# EAGLE board axiom_beta_interface_cmv12000_v0.3.698cb37a (EAGLE 7.0.0)
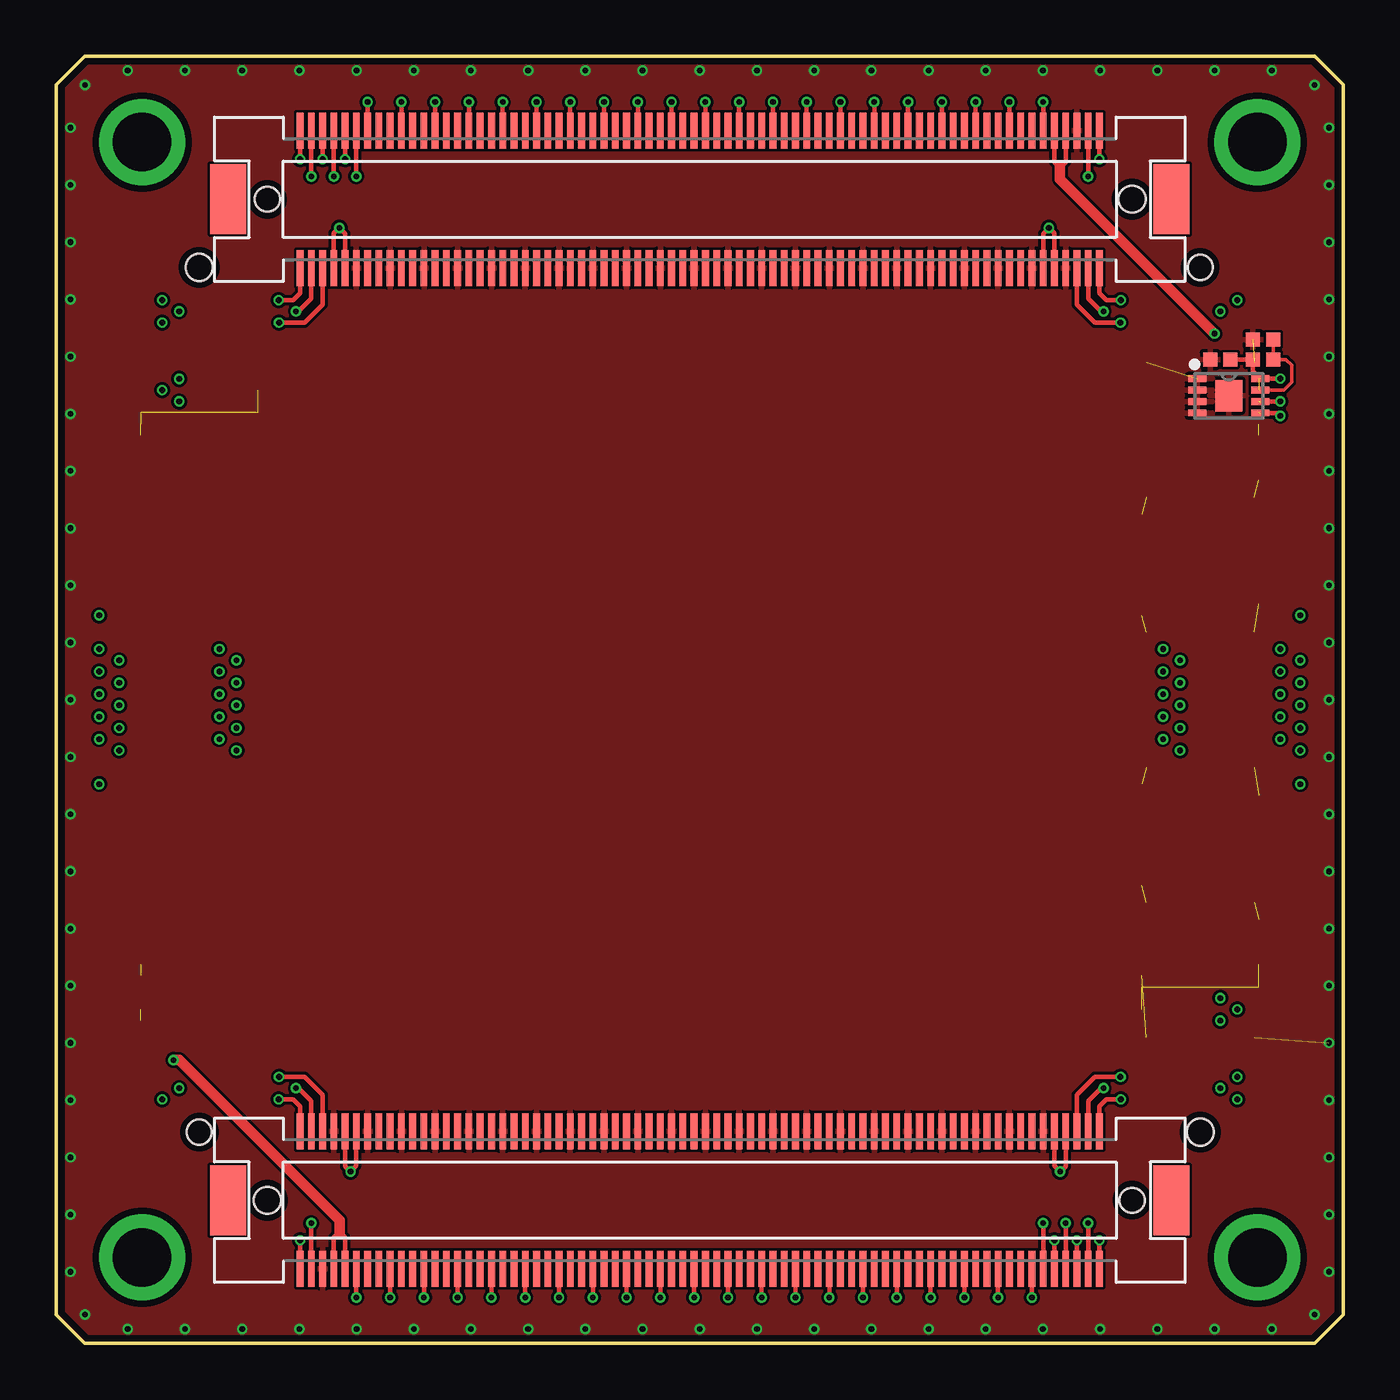
[diagram p0: board, top side]
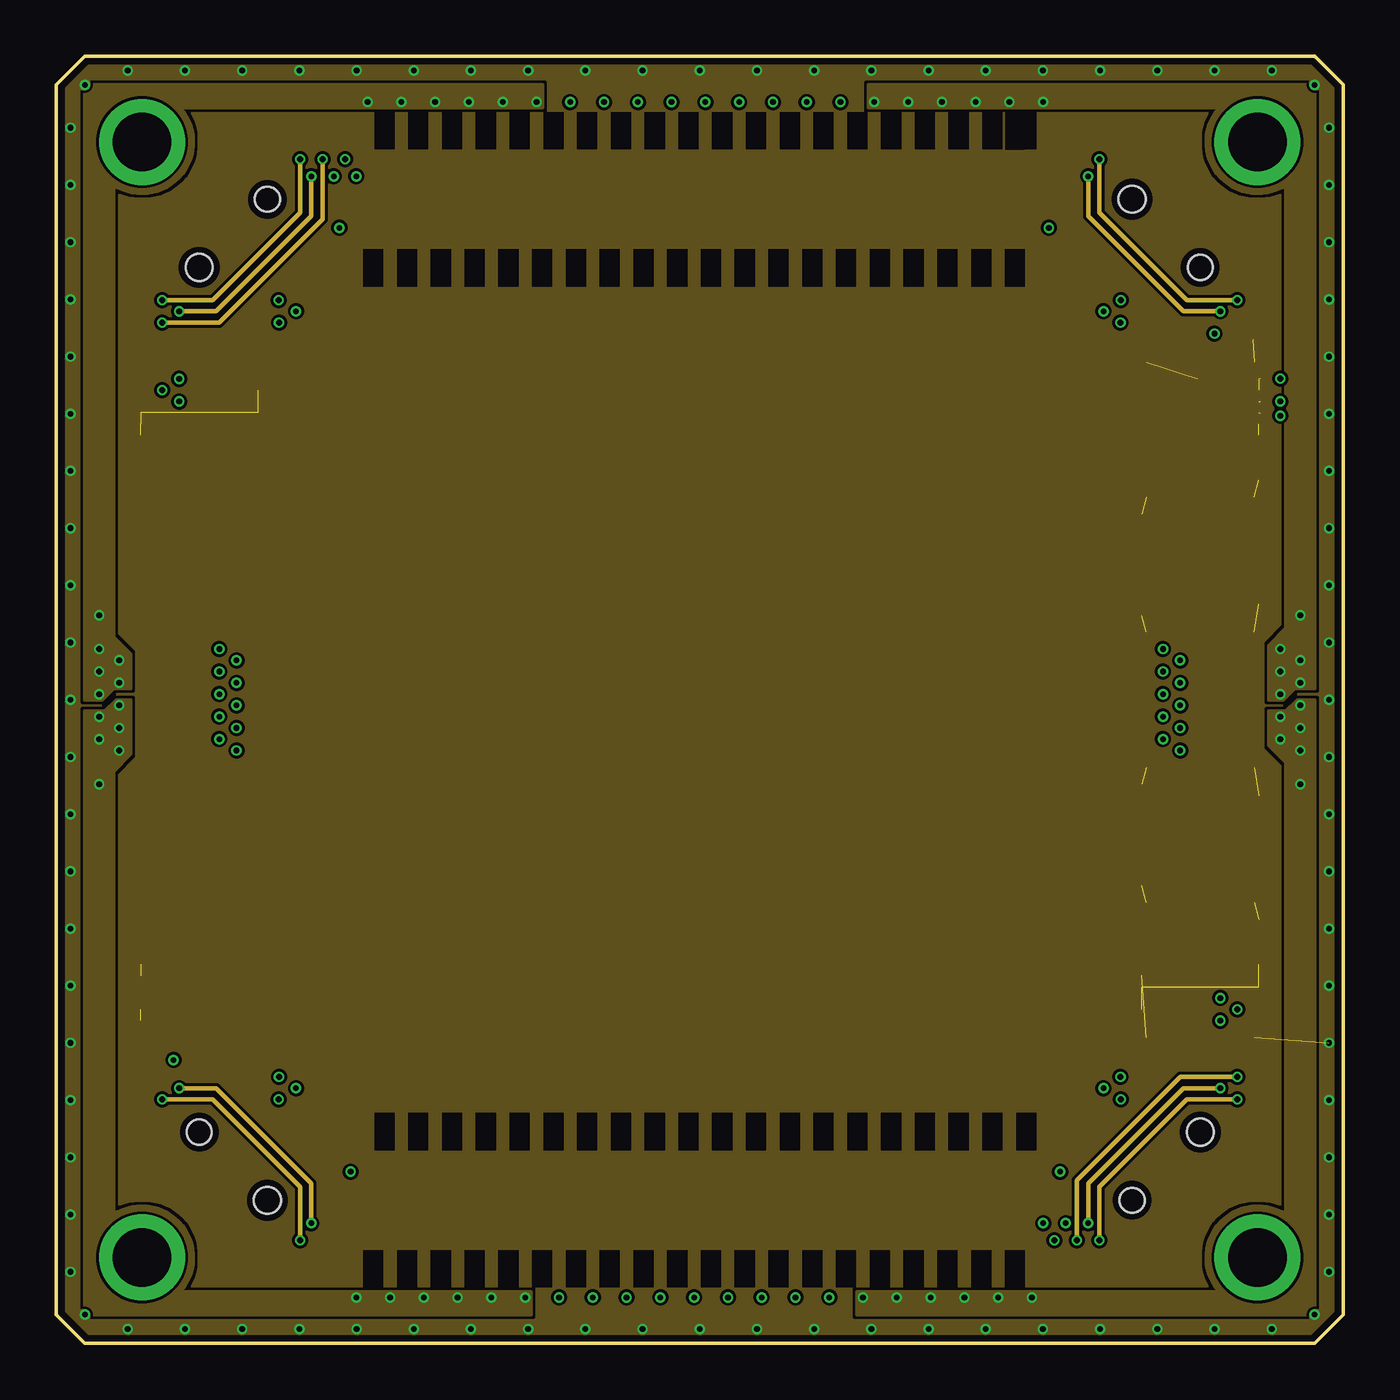
[diagram p1: board, inner layer Route2]
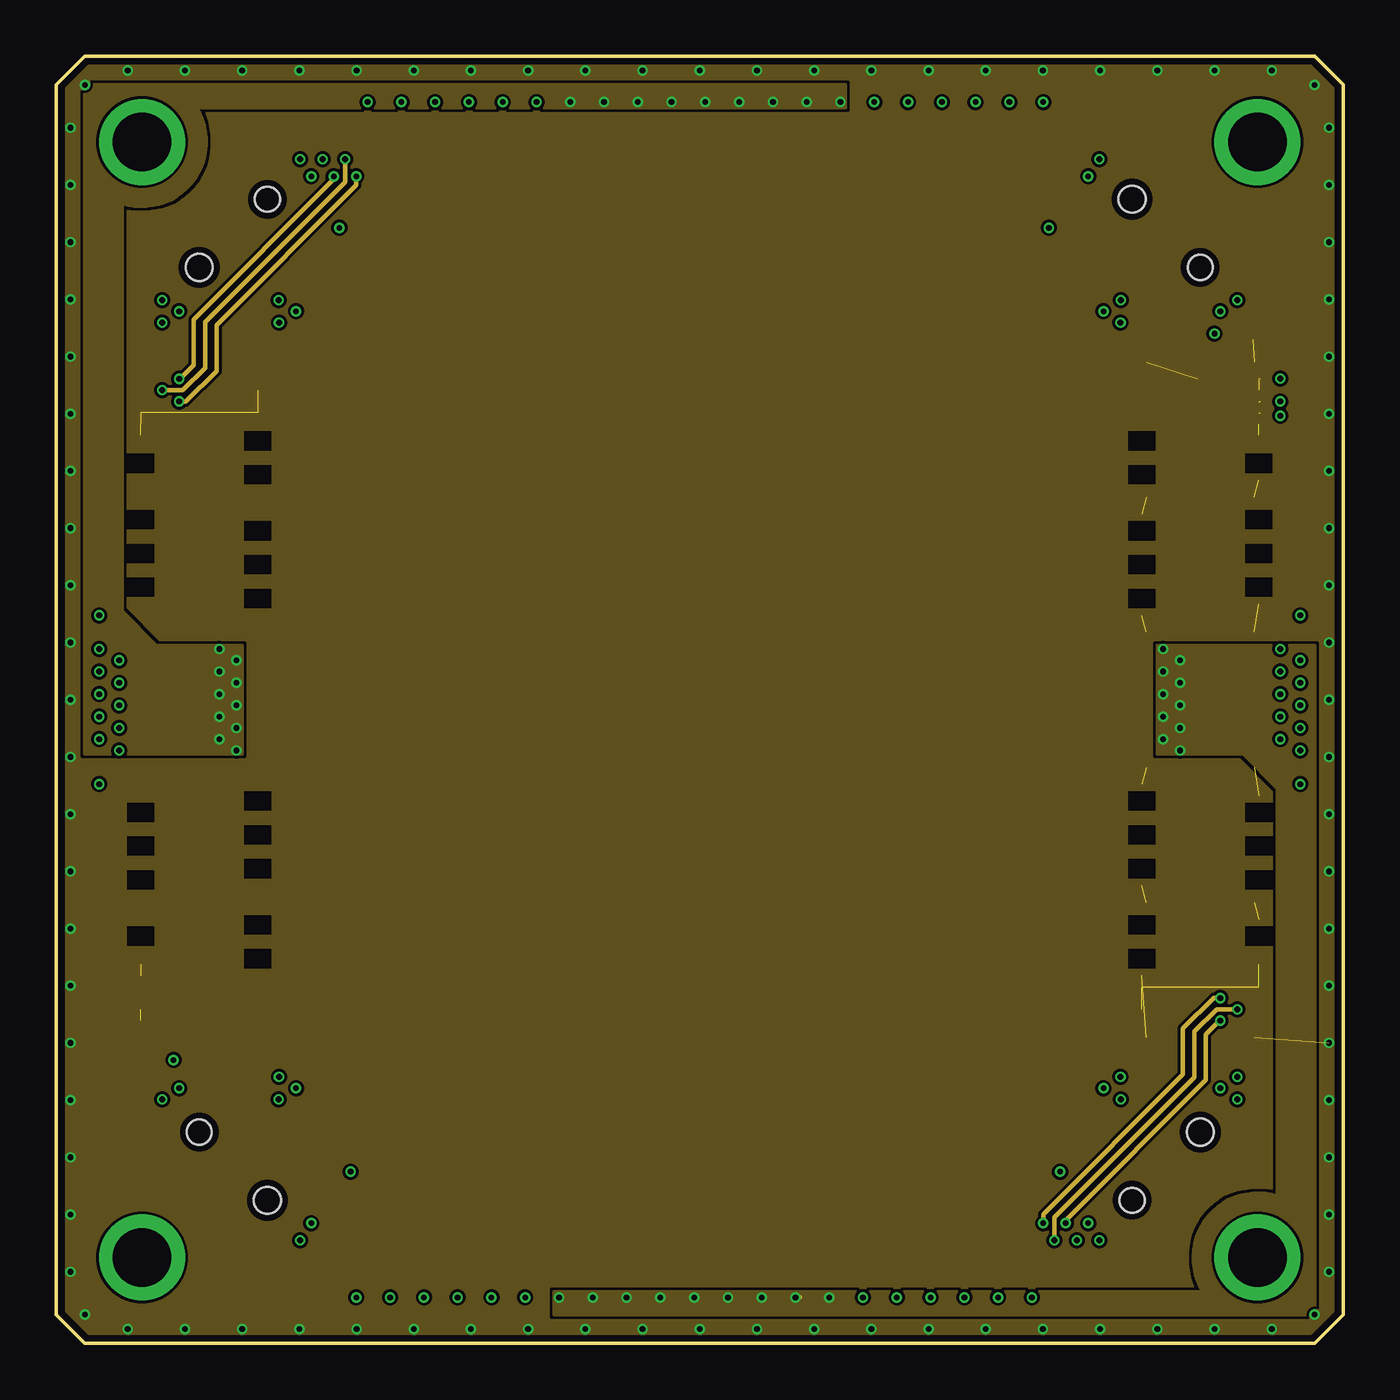
[diagram p2: board, inner layer Route15]
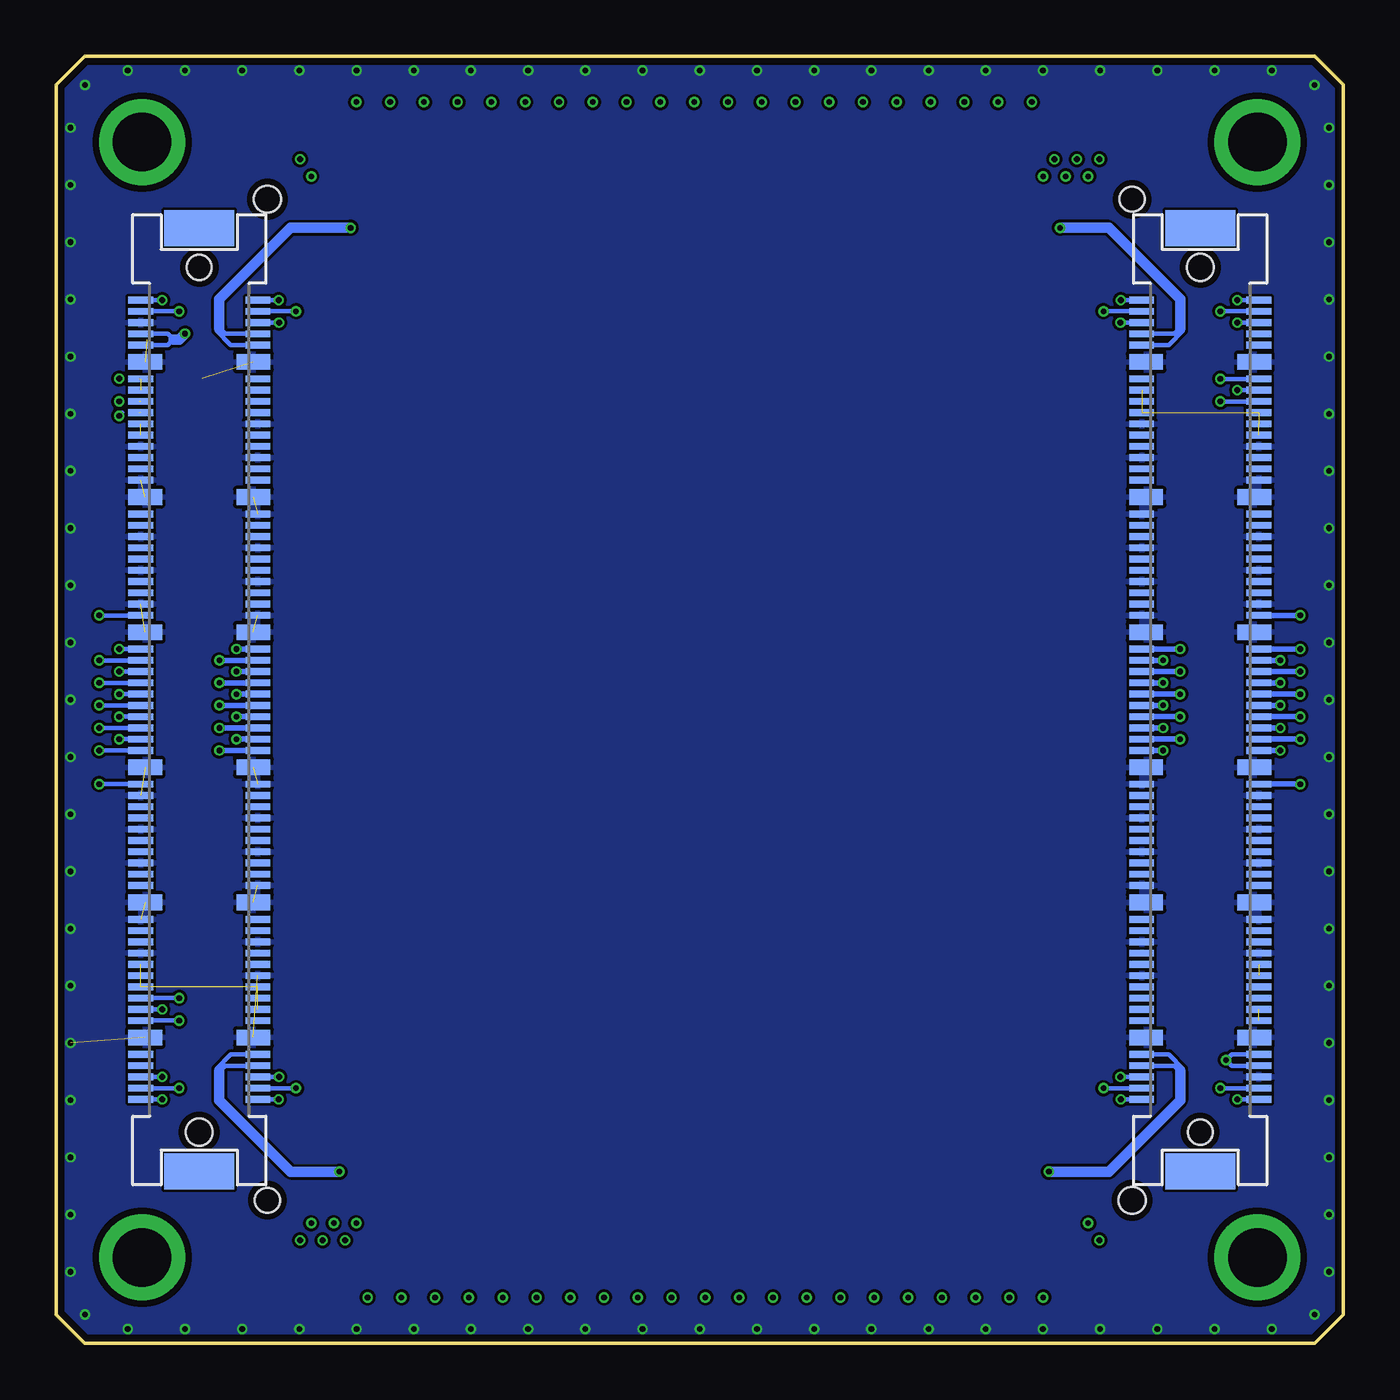
[diagram p3: board, bottom side, seen from below]

Size 57.15 x 57.15 mm. Coordinates in mm from the lower left corner, seen from the top.
Outline: 1.27,0 55.88,0 57.15,1.27 57.15,55.88 55.88,57.15 1.27,57.15 0,55.88 0,1.27 1.27,0
Copper layers (1*2*15*16): Top 0.035559375mm / dielectric 0.17018125mm / Route2 0.01778125mm / dielectric 47mil / Route15 0.01778125mm / dielectric 0.17018125mm / Bottom 0.035559375mm
Design rules "OSHPark-4layer-tuned *": minimum track width 5mil, minimum drill 10mil, track to track 5mil, track to pad 5mil, pad to pad 5mil, via to via 5mil, smd to smd 5mil, copper to edge 12mil, drill to drill 6mil, minimum pad ring 4mil, minimum via ring 4mil, stop-mask expansion 2mil, vias tented up to drill 15mil, thermal gap 6mil
Net classes: 0 default: width 0.152 mm, drill 0.254 mm; 1 power: width 0.152 mm, drill 0.254 mm
tRestrict: area 1.6,51.1 to 6,55.5; area 51.1,51.1 to 55.5,55.5; area 51.1,1.6 to 55.5,6; area 1.6,1.6 to 6,6
bRestrict: area 1.6,51.1 to 6,55.5; area 51.1,51.1 to 55.5,55.5; area 51.1,1.6 to 55.5,6; area 1.6,1.6 to 6,6

## Footprints (pad centres in the part's own frame; a part is rotated, then mirrored left to right if it is on the bottom)
0402-B = smd 0.62 x 0.62: 1 -0.45,0; 2 0.45,0
DFN200X300X100-9N = smd 0.813 x 0.305: 1 -1.397,0.762; 2 -1.397,0.254; 3 -1.397,-0.254; 4 -1.397,-0.762; 5 1.397,-0.762; 6 1.397,-0.254; 7 1.397,0.254; 8 1.397,0.762 | smd 1.194 x 1.397: EP 0,0
FX10A-120P/12 = smd 0.3 x 1.1: 1 -17.75,-2.6; 2 -17.75,2.6; 3 -17.25,-2.6; 4 -17.25,2.6; 5 -16.75,-2.6; 6 -16.75,2.6; 7 -16.25,-2.6; 8 -16.25,2.6; 9 -15.75,-2.6; 10 -15.75,2.6; 11 -14.25,-2.6; 12 -14.25,2.6; 13 -13.75,-2.6; 14 -13.75,2.6; 15 -13.25,-2.6; 16 -13.25,2.6; 17 -12.75,-2.6; 18 -12.75,2.6; 19 -12.25,-2.6; 20 -12.25,2.6; 21 -11.75,-2.6; 22 -11.75,2.6; 23 -11.25,-2.6; 24 -11.25,2.6; 25 -10.75,-2.6; 26 -10.75,2.6; 27 -10.25,-2.6; 28 -10.25,2.6; 29 -9.75,-2.6; 30 -9.75,2.6; 31 -8.25,-2.6; 32 -8.25,2.6; 33 -7.75,-2.6; 34 -7.75,2.6; 35 -7.25,-2.6; 36 -7.25,2.6; 37 -6.75,-2.6; 38 -6.75,2.6; 39 -6.25,-2.6; 40 -6.25,2.6; 41 -5.75,-2.6; 42 -5.75,2.6; 43 -5.25,-2.6; 44 -5.25,2.6; 45 -4.75,-2.6; 46 -4.75,2.6; 47 -4.25,-2.6; 48 -4.25,2.6; 49 -3.75,-2.6; 50 -3.75,2.6; 51 -2.25,-2.6; 52 -2.25,2.6; 53 -1.75,-2.6; 54 -1.75,2.6; 55 -1.25,-2.6; 56 -1.25,2.6; 57 -0.75,-2.6; 58 -0.75,2.6; 59 -0.25,-2.6; 60 -0.25,2.6; 61 0.25,-2.6; 62 0.25,2.6; 63 0.75,-2.6; 64 0.75,2.6; 65 1.25,-2.6; 66 1.25,2.6; 67 1.75,-2.6; 68 1.75,2.6; 69 2.25,-2.6; 70 2.25,2.6; 71 3.75,-2.6; 72 3.75,2.6; 73 4.25,-2.6; 74 4.25,2.6; 75 4.75,-2.6; 76 4.75,2.6; 77 5.25,-2.6; 78 5.25,2.6; 79 5.75,-2.6; 80 5.75,2.6; 81 6.25,-2.6; 82 6.25,2.6; 83 6.75,-2.6; 84 6.75,2.6; 85 7.25,-2.6; 86 7.25,2.6; 87 7.75,-2.6; 88 7.75,2.6; 89 8.25,-2.6; 90 8.25,2.6; 91 9.75,-2.6; 92 9.75,2.6; 93 10.25,-2.6; 94 10.25,2.6; 95 10.75,-2.6; 96 10.75,2.6; 97 11.25,-2.6; 98 11.25,2.6; 99 11.75,-2.6; 100 11.75,2.6; 101 12.25,-2.6; 102 12.25,2.6; 103 12.75,-2.6; 104 12.75,2.6; 105 13.25,-2.6; 106 13.25,2.6; 107 13.75,-2.6; 108 13.75,2.6; 109 14.25,-2.6; 110 14.25,2.6; 111 15.75,-2.6; 112 15.75,2.6; 113 16.25,-2.6; 114 16.25,2.6; 115 16.75,-2.6; 116 16.75,2.6; 117 17.25,-2.6; 118 17.25,2.6; 119 17.75,-2.6; 120 17.75,2.6 | smd 0.7 x 1.5: G1 -15,-2.4; G2 -15,2.4; G3 -9,-2.4; G4 -9,2.4; G5 -3,-2.4; G6 -3,2.4; G7 3,-2.4; G8 3,2.4; G9 9,-2.4; G10 9,2.4; G11 15,-2.4; G12 15,2.4 | smd 1.6 x 3.1: M1 -20.95,0; M2 20.95,0 | hole 1.1: -19.2,0 | hole 1.2: 19.2,0
FX10A-144S = smd 0.3 x 1.6: 1 -17.75,-3.05; 2 -17.75,3.05; 3 -17.25,-3.05; 4 -17.25,3.05; 5 -16.75,-3.05; 6 -16.75,3.05; 7 -16.25,-3.05; 8 -16.25,3.05; 9 -15.75,-3.05; 10 -15.75,3.05; 11 -15.25,-3.05; 12 -15.25,3.05; 13 -14.75,-3.05; 14 -14.75,3.05; 15 -14.25,-3.05; 16 -14.25,3.05; 17 -13.75,-3.05; 18 -13.75,3.05; 19 -13.25,-3.05; 20 -13.25,3.05; 21 -12.75,-3.05; 22 -12.75,3.05; 23 -12.25,-3.05; 24 -12.25,3.05; 25 -11.75,-3.05; 26 -11.75,3.05; 27 -11.25,-3.05; 28 -11.25,3.05; 29 -10.75,-3.05; 30 -10.75,3.05; 31 -10.25,-3.05; 32 -10.25,3.05; 33 -9.75,-3.05; 34 -9.75,3.05; 35 -9.25,-3.05; 36 -9.25,3.05; 37 -8.75,-3.05; 38 -8.75,3.05; 39 -8.25,-3.05; 40 -8.25,3.05; 41 -7.75,-3.05; 42 -7.75,3.05; 43 -7.25,-3.05; 44 -7.25,3.05; 45 -6.75,-3.05; 46 -6.75,3.05; 47 -6.25,-3.05; 48 -6.25,3.05; 49 -5.75,-3.05; 50 -5.75,3.05; 51 -5.25,-3.05; 52 -5.25,3.05; 53 -4.75,-3.05; 54 -4.75,3.05; 55 -4.25,-3.05; 56 -4.25,3.05; 57 -3.75,-3.05; 58 -3.75,3.05; 59 -3.25,-3.05; 60 -3.25,3.05; 61 -2.75,-3.05; 62 -2.75,3.05; 63 -2.25,-3.05; 64 -2.25,3.05; 65 -1.75,-3.05; 66 -1.75,3.05; 67 -1.25,-3.05; 68 -1.25,3.05; 69 -0.75,-3.05; 70 -0.75,3.05; 71 -0.25,-3.05; 72 -0.25,3.05; 73 0.25,-3.05; 74 0.25,3.05; 75 0.75,-3.05; 76 0.75,3.05; 77 1.25,-3.05; 78 1.25,3.05; 79 1.75,-3.05; 80 1.75,3.05; 81 2.25,-3.05; 82 2.25,3.05; 83 2.75,-3.05; 84 2.75,3.05; 85 3.25,-3.05; 86 3.25,3.05; 87 3.75,-3.05; 88 3.75,3.05; 89 4.25,-3.05; 90 4.25,3.05; 91 4.75,-3.05; 92 4.75,3.05; 93 5.25,-3.05; 94 5.25,3.05; 95 5.75,-3.05; 96 5.75,3.05; 97 6.25,-3.05; 98 6.25,3.05; 99 6.75,-3.05; 100 6.75,3.05; 101 7.25,-3.05; 102 7.25,3.05; 103 7.75,-3.05; 104 7.75,3.05; 105 8.25,-3.05; 106 8.25,3.05; 107 8.75,-3.05; 108 8.75,3.05; 109 9.25,-3.05; 110 9.25,3.05; 111 9.75,-3.05; 112 9.75,3.05; 113 10.25,-3.05; 114 10.25,3.05; 115 10.75,-3.05; 116 10.75,3.05; 117 11.25,-3.05; 118 11.25,3.05; 119 11.75,-3.05; 120 11.75,3.05; 121 12.25,-3.05; 122 12.25,3.05; 123 12.75,-3.05; 124 12.75,3.05; 125 13.25,-3.05; 126 13.25,3.05; 127 13.75,-3.05; 128 13.75,3.05; 129 14.25,-3.05; 130 14.25,3.05; 131 14.75,-3.05; 132 14.75,3.05; 133 15.25,-3.05; 134 15.25,3.05; 135 15.75,-3.05; 136 15.75,3.05; 137 16.25,-3.05; 138 16.25,3.05; 139 16.75,-3.05; 140 16.75,3.05; 141 17.25,-3.05; 142 17.25,3.05; 143 17.75,-3.05; 144 17.75,3.05 | smd 1.6 x 3.1: M1 -20.95,0; M2 20.95,0 | hole 1.1: -19.2,0 | hole 1.2: 19.2,0

## Placement (x,y rotation side)
C1  [0402-B]  51.69,43.69 180 top
PARALLELLA  [PARALLELLA-FRAME]  28.57,28.57 0 top
R1  [0402-B]  53.59,43.69 0 top
R2  [0402-B]  53.59,44.58 180 top
U1  BR24G04NUX  [DFN200X300X100-9N]  52.07,42.08 0 top
U$1  [µZ-FRAME]  28.57,28.57 0 top
X-EAST  FX10-120/12P  [FX10A-120P/12]  50.8,28.57 270 bottom
X-NORTH  FX10-144S  [FX10A-144S]  28.57,50.8 0 top
X-SOUTH  FX10-144S  [FX10A-144S]  28.57,6.35 180 top
X-WEST  FX10-120/12P  [FX10A-120P/12]  6.35,28.57 90 bottom

## Library data of the parts
C1 R1 R2 = generic-rcl
PARALLELLA = parallella
U1 = eeprom
U$1 = microzed
X-EAST X-NORTH X-SOUTH X-WEST = fx10

## Nets
CLK_IN: X-NORTH.127
E00_N: X-EAST.22
E00_P: X-EAST.24
E01_N: X-EAST.25
E01_P: X-EAST.27
E02_N: X-EAST.28
E02_P: X-EAST.30
E03_N: X-EAST.31
E03_P: X-EAST.33
E04_N: X-EAST.34
E04_P: X-EAST.36
E05_N: X-EAST.37
E05_P: X-EAST.39
E06_N: X-EAST.40
E06_P: X-EAST.42
E07_N: X-EAST.43
E07_P: X-EAST.45
E08_N: X-EAST.46
E08_P: X-EAST.48
E09_N: X-EAST.74
E09_P: X-EAST.76
E10_N: X-EAST.75
E10_P: X-EAST.77
E11_N: X-EAST.80
E11_P: X-EAST.82
E12_N: X-EAST.81
E12_P: X-EAST.83
E13_N: X-EAST.86
E13_P: X-EAST.88
E14_N: X-EAST.87
E14_P: X-EAST.89
E15_N: X-EAST.92
E15_P: X-EAST.94
E16_N: X-EAST.93
E16_P: X-EAST.95
E17_N: X-EAST.98
E17_P: X-EAST.100
E_I2C_V: C1.1 R1.1 U1.8 X-EAST.11 X-EAST.13
E_JTAG_V: X-EAST.19 X-EAST.21
E_SCL: U1.6 X-EAST.15
E_SDA: U1.5 X-EAST.17
E_VE: X-EAST.99 X-EAST.101 X-EAST.103 X-EAST.104 X-EAST.106 X-EAST.108
E_VE_CV: X-EAST.110
E_VE_OV: X-EAST.113
E_VE_UV: X-EAST.111
FRAME_REQ: X-NORTH.130
GND [power]: C1.2 R2.2 U1.1 U1.2 U1.3 U1.4 U1.EP X-EAST.5 X-EAST.20 X-EAST.23 X-EAST.26 X-EAST.29 X-EAST.32 X-EAST.35 X-EAST.38 X-EAST.41 X-EAST.44 X-EAST.47 X-EAST.50 X-EAST.72 X-EAST.73 X-EAST.78 X-EAST.79 X-EAST.84 X-EAST.85 X-EAST.90 X-EAST.91 X-EAST.96 X-EAST.97 X-EAST.102 X-EAST.G1 X-EAST.G2 X-EAST.G3 X-EAST.G4 X-EAST.G5 X-EAST.G6 X-EAST.G7 X-EAST.G8 X-EAST.G9 X-EAST.G10 X-EAST.G11 X-EAST.G12 X-NORTH.11 X-NORTH.17 X-NORTH.23 X-NORTH.29 X-NORTH.35 X-NORTH.41 X-NORTH.47 X-NORTH.53 X-NORTH.59 X-NORTH.65 X-NORTH.71 X-NORTH.77 X-NORTH.83 X-NORTH.89 X-NORTH.95 X-NORTH.101 X-NORTH.107 X-NORTH.113 X-NORTH.119 X-NORTH.125 X-NORTH.131 X-NORTH.137 X-NORTH.140 X-SOUTH.11 X-SOUTH.17 X-SOUTH.23 X-SOUTH.29 X-SOUTH.35 X-SOUTH.41 X-SOUTH.47 X-SOUTH.53 X-SOUTH.59 X-SOUTH.65 X-SOUTH.71 X-SOUTH.77 X-SOUTH.83 X-SOUTH.89 X-SOUTH.95 X-SOUTH.101 X-SOUTH.107 X-SOUTH.113 X-SOUTH.119 X-SOUTH.125 X-SOUTH.131 X-SOUTH.137 X-SOUTH.140 X-WEST.5 X-WEST.20 X-WEST.23 X-WEST.26 X-WEST.29 X-WEST.32 X-WEST.35 X-WEST.38 X-WEST.41 X-WEST.44 X-WEST.47 X-WEST.50 X-WEST.72 X-WEST.73 X-WEST.78 X-WEST.79 X-WEST.84 X-WEST.85 X-WEST.90 X-WEST.91 X-WEST.96 X-WEST.97 X-WEST.102 X-WEST.G1 X-WEST.G2 X-WEST.G3 X-WEST.G4 X-WEST.G5 X-WEST.G6 X-WEST.G7 X-WEST.G8 X-WEST.G9 X-WEST.G10 X-WEST.G11 X-WEST.G12
LVDS_CLK_N: X-NORTH.13
LVDS_CLK_P: X-NORTH.15
N03_N: X-NORTH.24
N03_P: X-NORTH.22
N36_N: X-NORTH.123
N36_P: X-NORTH.121
N$12: R1.2 R2.1 U1.7
N_CHK_V: X-NORTH.7 X-NORTH.9 X-WEST.112 X-WEST.114
N_I2C_V: X-EAST.7 X-EAST.9 X-NORTH.136 X-NORTH.138
N_SCK: X-EAST.2 X-NORTH.143
N_SCL: X-EAST.1 X-NORTH.144
N_SDA: X-EAST.3 X-NORTH.142
N_SDI: X-EAST.6 X-NORTH.139
N_SDO: X-EAST.4 X-NORTH.141
N_SPI_V: X-EAST.8 X-EAST.10 X-NORTH.133 X-NORTH.135
N_VE [power]: X-EAST.49 X-EAST.51 X-EAST.53 X-EAST.55 X-EAST.57 X-EAST.59 X-NORTH.104 X-NORTH.110 X-NORTH.116 X-NORTH.122 X-NORTH.128 X-NORTH.134
N_VE_CV: X-NORTH.5 X-WEST.116
N_VE_OV: X-NORTH.6 X-WEST.115
N_VE_UV: X-NORTH.12 X-WEST.105
N_VN [power]: X-NORTH.50 X-NORTH.56 X-NORTH.62 X-NORTH.68 X-NORTH.74 X-NORTH.80 X-NORTH.86 X-NORTH.92 X-NORTH.98 X-WEST.52 X-WEST.54 X-WEST.56 X-WEST.58 X-WEST.60 X-WEST.62 X-WEST.64 X-WEST.66 X-WEST.68 X-WEST.70
N_VN_CV: X-NORTH.3 X-WEST.118
N_VN_OV: X-NORTH.4 X-WEST.117
N_VN_UV: X-NORTH.10 X-WEST.107
N_VW [power]: X-NORTH.14 X-NORTH.20 X-NORTH.26 X-NORTH.32 X-NORTH.38 X-NORTH.44 X-WEST.61 X-WEST.63 X-WEST.65 X-WEST.67 X-WEST.69 X-WEST.71
N_VW_CV: X-NORTH.1 X-WEST.120
N_VW_OV: X-NORTH.2 X-WEST.119
N_VW_UV: X-NORTH.8 X-WEST.109
OUT1_N: X-SOUTH.120
OUT1_P: X-SOUTH.118
OUT2_N: X-SOUTH.114
OUT2_P: X-SOUTH.112
OUT3_N: X-SOUTH.123
OUT3_P: X-SOUTH.121
OUT4_N: X-SOUTH.117
OUT4_P: X-SOUTH.115
OUT5_N: X-SOUTH.108
OUT5_P: X-SOUTH.106
OUT6_N: X-SOUTH.111
OUT6_P: X-SOUTH.109
OUT7_N: X-SOUTH.105
OUT7_P: X-SOUTH.103
OUT8_N: X-SOUTH.102
OUT8_P: X-SOUTH.100
OUT9_N: X-SOUTH.96
OUT9_P: X-SOUTH.94
OUT10_N: X-SOUTH.93
OUT10_P: X-SOUTH.91
OUT11_N: X-SOUTH.99
OUT11_P: X-SOUTH.97
OUT12_N: X-SOUTH.90
OUT12_P: X-SOUTH.88
OUT13_N: X-SOUTH.84
OUT13_P: X-SOUTH.82
OUT14_N: X-SOUTH.87
OUT14_P: X-SOUTH.85
OUT15_N: X-SOUTH.81
OUT15_P: X-SOUTH.79
OUT16_N: X-SOUTH.78
OUT16_P: X-SOUTH.76
OUT17_N: X-SOUTH.75
OUT17_P: X-SOUTH.73
OUT18_N: X-SOUTH.72
OUT18_P: X-SOUTH.70
OUT19_N: X-SOUTH.66
OUT19_P: X-SOUTH.64
OUT20_N: X-SOUTH.69
OUT20_P: X-SOUTH.67
OUT21_N: X-SOUTH.63
OUT21_P: X-SOUTH.61
OUT22_N: X-SOUTH.60
OUT22_P: X-SOUTH.58
OUT23_N: X-SOUTH.54
OUT23_P: X-SOUTH.52
OUT24_N: X-SOUTH.51
OUT24_P: X-SOUTH.49
OUT25_N: X-SOUTH.57
OUT25_P: X-SOUTH.55
OUT26_N: X-SOUTH.48
OUT26_P: X-SOUTH.46
OUT27_N: X-SOUTH.39
OUT27_P: X-SOUTH.37
OUT28_N: X-SOUTH.45
OUT28_P: X-SOUTH.43
OUT29_N: X-SOUTH.42
OUT29_P: X-SOUTH.40
OUT30_N: X-SOUTH.33
OUT30_P: X-SOUTH.31
OUT31_N: X-SOUTH.36
OUT31_P: X-SOUTH.34
OUT32_N: X-SOUTH.27
OUT32_P: X-SOUTH.25
OUT33_N: X-NORTH.19
OUT33_P: X-NORTH.21
OUT34_N: X-NORTH.28
OUT34_P: X-NORTH.30
OUT35_N: X-NORTH.25
OUT35_P: X-NORTH.27
OUT36_N: X-NORTH.34
OUT36_P: X-NORTH.36
OUT37_N: X-NORTH.31
OUT37_P: X-NORTH.33
OUT38_N: X-NORTH.37
OUT38_P: X-NORTH.39
OUT39_N: X-NORTH.40
OUT39_P: X-NORTH.42
OUT40_N: X-NORTH.43
OUT40_P: X-NORTH.45
OUT41_N: X-NORTH.46
OUT41_P: X-NORTH.48
OUT42_N: X-NORTH.49
OUT42_P: X-NORTH.51
OUT43_N: X-NORTH.52
OUT43_P: X-NORTH.54
OUT44_N: X-NORTH.55
OUT44_P: X-NORTH.57
OUT45_N: X-NORTH.58
OUT45_P: X-NORTH.60
OUT46_N: X-NORTH.61
OUT46_P: X-NORTH.63
OUT47_N: X-NORTH.64
OUT47_P: X-NORTH.66
OUT48_N: X-NORTH.67
OUT48_P: X-NORTH.69
OUT49_N: X-NORTH.73
OUT49_P: X-NORTH.75
OUT50_N: X-NORTH.70
OUT50_P: X-NORTH.72
OUT51_N: X-NORTH.79
OUT51_P: X-NORTH.81
OUT52_N: X-NORTH.76
OUT52_P: X-NORTH.78
OUT53_N: X-NORTH.85
OUT53_P: X-NORTH.87
OUT54_N: X-NORTH.82
OUT54_P: X-NORTH.84
OUT55_N: X-NORTH.91
OUT55_P: X-NORTH.93
OUT56_N: X-NORTH.88
OUT56_P: X-NORTH.90
OUT57_N: X-NORTH.97
OUT57_P: X-NORTH.99
OUT58_N: X-NORTH.94
OUT58_P: X-NORTH.96
OUT59_N: X-NORTH.103
OUT59_P: X-NORTH.105
OUT60_N: X-NORTH.109
OUT60_P: X-NORTH.111
OUT61_N: X-NORTH.100
OUT61_P: X-NORTH.102
OUT62_N: X-NORTH.115
OUT62_P: X-NORTH.117
OUT63_N: X-NORTH.106
OUT63_P: X-NORTH.108
OUT64_N: X-NORTH.112
OUT64_P: X-NORTH.114
OUTCLK_N: X-NORTH.16
OUTCLK_P: X-NORTH.18
OUTCTR_N: X-SOUTH.126
OUTCTR_P: X-SOUTH.124
S00_N: X-SOUTH.15
S00_P: X-SOUTH.13
S01_N: X-SOUTH.18
S01_P: X-SOUTH.16
S02_N: X-SOUTH.21
S02_P: X-SOUTH.19
S03_N: X-SOUTH.24
S03_P: X-SOUTH.22
S05_N: X-SOUTH.30
S05_P: X-SOUTH.28
S38_N: X-SOUTH.129
S38_P: X-SOUTH.127
S39_P: X-SOUTH.130
S_CHK_V: X-EAST.112 X-EAST.114 X-SOUTH.7 X-SOUTH.9
S_I2C_V: X-SOUTH.136 X-SOUTH.138 X-WEST.7 X-WEST.9
S_SCK: X-SOUTH.143 X-WEST.2
S_SCL: X-SOUTH.144 X-WEST.1
S_SDA: X-SOUTH.142 X-WEST.3
S_SDI: X-SOUTH.139 X-WEST.6
S_SDO: X-SOUTH.141 X-WEST.4
S_SPI_V: X-SOUTH.133 X-SOUTH.135 X-WEST.8 X-WEST.10
S_VE [power]: X-EAST.61 X-EAST.63 X-EAST.65 X-EAST.67 X-EAST.69 X-EAST.71 X-SOUTH.14 X-SOUTH.20 X-SOUTH.26 X-SOUTH.32 X-SOUTH.38 X-SOUTH.44
S_VE_CV: X-EAST.120 X-SOUTH.1
S_VE_OV: X-EAST.119 X-SOUTH.2
S_VE_UV: X-EAST.109 X-SOUTH.8
S_VS [power]: X-EAST.52 X-EAST.54 X-EAST.56 X-EAST.58 X-EAST.60 X-EAST.62 X-EAST.64 X-EAST.66 X-EAST.68 X-EAST.70 X-SOUTH.50 X-SOUTH.56 X-SOUTH.62 X-SOUTH.68 X-SOUTH.74 X-SOUTH.80 X-SOUTH.86 X-SOUTH.92 X-SOUTH.98
S_VS_CV: X-EAST.118 X-SOUTH.3
S_VS_OV: X-EAST.117 X-SOUTH.4
S_VS_UV: X-EAST.107 X-SOUTH.10
S_VW [power]: X-SOUTH.104 X-SOUTH.110 X-SOUTH.116 X-SOUTH.122 X-SOUTH.128 X-SOUTH.134 X-WEST.49 X-WEST.51 X-WEST.53 X-WEST.55 X-WEST.57 X-WEST.59
S_VW_CV: X-EAST.116 X-SOUTH.5
S_VW_OV: X-EAST.115 X-SOUTH.6
S_VW_UV: X-EAST.105 X-SOUTH.12
SPI_EN: X-NORTH.120
SYS_RES_N: X-NORTH.126
T_EXP1: X-NORTH.132
T_EXP2: X-NORTH.118
TCK: X-EAST.12
TDI: X-EAST.16
TDIG1: X-NORTH.124
TDIG2: X-NORTH.129
TDO: X-EAST.18
TMS: X-EAST.14
VREF_EN: X-SOUTH.132
W00_N: X-WEST.22
W00_P: X-WEST.24
W01_N: X-WEST.25
W01_P: X-WEST.27
W02_N: X-WEST.28
W02_P: X-WEST.30
W03_N: X-WEST.31
W03_P: X-WEST.33
W04_N: X-WEST.34
W04_P: X-WEST.36
W05_N: X-WEST.37
W05_P: X-WEST.39
W06_N: X-WEST.40
W06_P: X-WEST.42
W07_N: X-WEST.43
W07_P: X-WEST.45
W08_N: X-WEST.46
W08_P: X-WEST.48
W09_N: X-WEST.74
W09_P: X-WEST.76
W10_N: X-WEST.75
W10_P: X-WEST.77
W11_N: X-WEST.80
W11_P: X-WEST.82
W12_N: X-WEST.81
W12_P: X-WEST.83
W13_N: X-WEST.86
W13_P: X-WEST.88
W14_N: X-WEST.87
W14_P: X-WEST.89
W15_N: X-WEST.92
W15_P: X-WEST.94
W16_N: X-WEST.93
W16_P: X-WEST.95
W17_N: X-WEST.98
W17_P: X-WEST.100
W_EN: X-WEST.14
W_I2C_V: X-WEST.11 X-WEST.13
W_SCK: X-WEST.12
W_SCL: X-WEST.15
W_SDA: X-WEST.17
W_SDI: X-WEST.16
W_SDI_V: X-WEST.19 X-WEST.21
W_SDO: X-WEST.18
W_VW: X-WEST.99 X-WEST.101 X-WEST.103 X-WEST.104 X-WEST.106 X-WEST.108
W_VW_CV: X-WEST.110
W_VW_OV: X-WEST.113
W_VW_UV: X-WEST.111

## Tracks (layer width: path | path; a pad name or v marks a point on that pad's centre or on a via)
E_I2C_V  (via drill 0.25)  (2 unrouted)
  Top 0.203: v54.36,42.84 U1.8 53.14,43.16 R1.1 C1.1
E_JTAG_V  (1 unrouted)
E_SCL  (via drill 0.25)  (1 unrouted)
  Top 0.203: U1.6 v54.36,41.82
  Bottom 0.203: v54.35,41.83 v54.36,41.82
E_SDA  (via drill 0.25)  (1 unrouted)
  Top 0.203: 54.25,41.29 v54.36,41.19 54.23,41.31 U1.5
  Bottom 0.203: 54.22,41.33 v54.36,41.19
E_VE  (5 unrouted)
GND  (via drill 0.25)  (12 unrouted)
  other vias: 1.27,1.27 0.63,3.18 0.63,5.71 0.63,8.25 0.63,10.79 0.63,13.33 0.63,15.88 0.63,18.41 0.63,20.95 0.63,23.49 0.63,26.04 0.63,28.57 0.63,31.11 0.63,33.66 0.63,36.2 0.63,38.73 0.63,41.27 0.63,43.81 0.63,46.36 0.63,48.89 0.63,51.44 0.63,53.97 1.27,55.88 56.52,3.18 56.52,5.71 56.52,8.25 56.52,10.79 56.52,13.33 56.52,15.88 56.52,18.41 56.52,20.95 56.52,23.49 56.52,26.04 56.52,28.57 56.52,31.11 56.52,33.66 56.52,36.2 56.52,38.73 56.52,41.27 56.52,43.81 56.52,46.36 56.52,48.89 56.52,51.44 56.52,53.97 55.88,55.88 53.97,56.52 51.44,56.52 48.89,56.52 46.36,56.52 43.81,56.52 41.27,56.52 38.73,56.52 36.2,56.52 33.66,56.52 31.11,56.52 28.57,56.52 26.04,56.52 23.49,56.52 20.95,56.52 18.41,56.52 15.88,56.52 13.33,56.52 10.79,56.52 8.25,56.52 5.71,56.52 3.18,56.52 53.97,0.63 51.44,0.63 48.89,0.63 46.36,0.63 43.81,0.63 41.27,0.63 38.73,0.63 36.2,0.63 33.66,0.63 31.11,0.63 28.57,0.63 26.04,0.63 23.49,0.63 20.95,0.63 18.41,0.63 15.88,0.63 13.33,0.63 10.79,0.63 8.25,0.63 5.71,0.63 3.18,0.63 55.88,1.27
  pour Top (rank 3): 0,57.15 57.15,57.15 57.15,0 0,0
  pour Route2 (rank 3): 0,57.15 57.15,57.15 57.15,0 0,0
  pour Route15 (rank 3): 0,57.15 57.15,57.15 57.15,0 0,0
  pour Bottom (rank 3): 0,57.15 57.15,57.15 57.15,0 0,0
N$1
  cutout Route15: 52.83,39.5 53.97,39.5 53.97,38.65 52.83,38.65
  cutout Route15: 52.83,37 53.97,37 53.97,36.15 52.83,36.15
  cutout Route15: 52.83,35.5 53.97,35.5 53.97,34.65 52.83,34.65
  cutout Route15: 52.83,34 53.97,34 53.97,33.15 52.83,33.15
  cutout Route15: 52.83,24 53.97,24 53.97,23.15 52.83,23.15
  cutout Route15: 52.83,22.5 53.97,22.5 53.97,21.65 52.83,21.65
  cutout Route15: 52.83,21 53.97,21 53.97,20.15 52.83,20.15
  cutout Route15: 52.83,18.5 53.97,18.5 53.97,17.65 52.83,17.65
  cutout Route15: 47.62,19 48.77,19 48.77,18.15 47.62,18.15
  cutout Route15: 47.62,17.5 48.77,17.5 48.77,16.65 47.62,16.65
  cutout Route15: 47.62,21.5 48.77,21.5 48.77,20.65 47.62,20.65
  cutout Route15: 47.62,23 48.77,23 48.77,22.15 47.62,22.15
  cutout Route15: 47.62,24.5 48.77,24.5 48.77,23.65 47.62,23.65
  cutout Route15: 47.62,33.5 48.77,33.5 48.77,32.65 47.62,32.65
  cutout Route15: 47.62,35 48.77,35 48.77,34.15 47.62,34.15
  cutout Route15: 47.62,36.5 48.77,36.5 48.77,35.65 47.62,35.65
  cutout Route15: 47.62,39 48.77,39 48.77,38.15 47.62,38.15
  cutout Route15: 47.62,40.5 48.77,40.5 48.77,39.65 47.62,39.65
  cutout Route15: 9.52,32.65 8.38,32.65 8.38,33.5 9.52,33.5
  cutout Route15: 9.52,34.15 8.38,34.15 8.38,35 9.52,35
  cutout Route15: 9.52,35.65 8.38,35.65 8.38,36.5 9.52,36.5
  cutout Route15: 9.52,38.15 8.38,38.15 8.38,39 9.52,39
  cutout Route15: 9.52,39.65 8.38,39.65 8.38,40.5 9.52,40.5
  cutout Route15: 9.52,23.65 8.38,23.65 8.38,24.5 9.52,24.5
  cutout Route15: 9.52,22.15 8.38,22.15 8.38,23 9.52,23
  cutout Route15: 9.52,20.65 8.38,20.65 8.38,21.5 9.52,21.5
  cutout Route15: 9.52,18.15 8.38,18.15 8.38,19 9.52,19
  cutout Route15: 9.52,16.65 8.38,16.65 8.38,17.5 9.52,17.5
  cutout Route15: 4.32,17.65 3.18,17.65 3.18,18.5 4.32,18.5
  cutout Route15: 4.32,20.15 3.18,20.15 3.18,21 4.32,21
  cutout Route15: 4.32,21.65 3.18,21.65 3.18,22.5 4.32,22.5
  cutout Route15: 4.32,23.15 3.18,23.15 3.18,24 4.32,24
  cutout Route15: 4.32,33.15 3.18,33.15 3.18,34 4.32,34
  cutout Route15: 4.32,34.65 3.18,34.65 3.18,35.5 4.32,35.5
  cutout Route15: 4.32,36.15 3.18,36.15 3.18,37 4.32,37
  cutout Route15: 4.32,38.65 3.18,38.65 3.18,39.5 4.32,39.5
  cutout Route2: 38.15,53.02 38.15,54.67 39,54.67 39,53.02
  cutout Route2: 36.65,53.02 36.65,54.67 37.5,54.67 37.5,53.02
  cutout Route2: 35.15,53.02 35.15,54.67 36,54.67 36,53.02
  cutout Route2: 33.65,53.02 33.65,54.67 34.5,54.67 34.5,53.02
  cutout Route2: 32.15,53.02 32.15,54.67 33,54.67 33,53.02
  cutout Route2: 30.65,53.02 30.65,54.67 31.5,54.67 31.5,53.02
  cutout Route2: 29.15,53.02 29.15,54.67 30,54.67 30,53.02
  cutout Route2: 27.65,53.02 27.65,54.67 28.5,54.67 28.5,53.02
  cutout Route2: 26.15,53.02 26.15,54.67 27,54.67 27,53.02
  cutout Route2: 24.65,53.02 24.65,54.67 25.5,54.67 25.5,53.02
  cutout Route2: 23.15,53.02 23.15,54.67 24,54.67 24,53.02
  cutout Route2: 21.65,53.02 21.65,54.67 22.5,54.67 22.5,53.02
  cutout Route2: 20.15,53.02 20.15,54.67 21,54.67 21,53.02
  cutout Route2: 18.65,53.02 18.65,54.67 19.5,54.67 19.5,53.02
  cutout Route2: 17.15,53.02 17.15,54.67 18,54.67 18,53.02
  cutout Route2: 15.65,53.02 15.65,54.67 16.5,54.67 16.5,53.02
  cutout Route2: 14.15,53.02 14.15,54.67 15,54.67 15,53.02
  cutout Route2: 39.65,53.02 39.65,54.67 40.5,54.67 40.5,53.02
  cutout Route2: 41.15,53.02 41.15,54.67 42,54.67 42,53.02
  cutout Route2: 42.65,53.02 42.65,54.67 43.5,54.67 43.5,53.02
  cutout Route2: 40.65,46.92 40.65,48.58 41.5,48.58 41.5,46.92
  cutout Route2: 42.15,46.92 42.15,48.58 43,48.58 43,46.92
  cutout Route2: 39.15,46.92 39.15,48.58 40,48.58 40,46.92
  cutout Route2: 37.65,46.92 37.65,48.58 38.5,48.58 38.5,46.92
  cutout Route2: 36.15,46.92 36.15,48.58 37,48.58 37,46.92
  cutout Route2: 34.65,46.92 34.65,48.58 35.5,48.58 35.5,46.92
  cutout Route2: 33.15,46.92 33.15,48.58 34,48.58 34,46.92
  cutout Route2: 31.65,46.92 31.65,48.58 32.5,48.58 32.5,46.92
  cutout Route2: 30.15,46.92 30.15,48.58 31,48.58 31,46.92
  cutout Route2: 28.65,46.92 28.65,48.58 29.5,48.58 29.5,46.92
  cutout Route2: 27.15,46.92 27.15,48.58 28,48.58 28,46.92
  cutout Route2: 25.65,46.92 25.65,48.58 26.5,48.58 26.5,46.92
  cutout Route2: 24.15,46.92 24.15,48.58 25,48.58 25,46.92
  cutout Route2: 22.65,46.92 22.65,48.58 23.5,48.58 23.5,46.92
  cutout Route2: 21.15,46.92 21.15,48.58 22,48.58 22,46.92
  cutout Route2: 19.65,46.92 19.65,48.58 20.5,48.58 20.5,46.92
  cutout Route2: 18.15,46.92 18.15,48.58 19,48.58 19,46.92
  cutout Route2: 16.65,46.92 16.65,48.58 17.5,48.58 17.5,46.92
  cutout Route2: 15.15,46.92 15.15,48.58 16,48.58 16,46.92
  cutout Route2: 13.65,46.92 13.65,48.58 14.5,48.58 14.5,46.92
N$4
  cutout Route2: 19,4.12 19,2.47 18.15,2.47 18.15,4.12
  cutout Route2: 20.5,4.12 20.5,2.47 19.65,2.47 19.65,4.12
  cutout Route2: 22,4.12 22,2.47 21.15,2.47 21.15,4.12
  cutout Route2: 23.5,4.12 23.5,2.47 22.65,2.47 22.65,4.12
  cutout Route2: 25,4.12 25,2.47 24.15,2.47 24.15,4.12
  cutout Route2: 26.5,4.12 26.5,2.47 25.65,2.47 25.65,4.12
  cutout Route2: 28,4.12 28,2.47 27.15,2.47 27.15,4.12
  cutout Route2: 29.5,4.12 29.5,2.47 28.65,2.47 28.65,4.12
  cutout Route2: 31,4.12 31,2.47 30.15,2.47 30.15,4.12
  cutout Route2: 32.5,4.12 32.5,2.47 31.65,2.47 31.65,4.12
  cutout Route2: 34,4.12 34,2.47 33.15,2.47 33.15,4.12
  cutout Route2: 35.5,4.12 35.5,2.47 34.65,2.47 34.65,4.12
  cutout Route2: 37,4.12 37,2.47 36.15,2.47 36.15,4.12
  cutout Route2: 38.5,4.12 38.5,2.47 37.65,2.47 37.65,4.12
  cutout Route2: 40,4.12 40,2.47 39.15,2.47 39.15,4.12
  cutout Route2: 41.5,4.12 41.5,2.47 40.65,2.47 40.65,4.12
  cutout Route2: 43,4.12 43,2.47 42.15,2.47 42.15,4.12
  cutout Route2: 17.5,4.12 17.5,2.47 16.65,2.47 16.65,4.12
  cutout Route2: 16,4.12 16,2.47 15.15,2.47 15.15,4.12
  cutout Route2: 14.5,4.12 14.5,2.47 13.65,2.47 13.65,4.12
  cutout Route2: 16.5,10.22 16.5,8.57 15.65,8.57 15.65,10.22
  cutout Route2: 15,10.22 15,8.57 14.15,8.57 14.15,10.22
  cutout Route2: 18,10.22 18,8.57 17.15,8.57 17.15,10.22
  cutout Route2: 19.5,10.22 19.5,8.57 18.65,8.57 18.65,10.22
  cutout Route2: 21,10.22 21,8.57 20.15,8.57 20.15,10.22
  cutout Route2: 22.5,10.22 22.5,8.57 21.65,8.57 21.65,10.22
  cutout Route2: 24,10.22 24,8.57 23.15,8.57 23.15,10.22
  cutout Route2: 25.5,10.22 25.5,8.57 24.65,8.57 24.65,10.22
  cutout Route2: 27,10.22 27,8.57 26.15,8.57 26.15,10.22
  cutout Route2: 28.5,10.22 28.5,8.57 27.65,8.57 27.65,10.22
  cutout Route2: 30,10.22 30,8.57 29.15,8.57 29.15,10.22
  cutout Route2: 31.5,10.22 31.5,8.57 30.65,8.57 30.65,10.22
  cutout Route2: 33,10.22 33,8.57 32.15,8.57 32.15,10.22
  cutout Route2: 34.5,10.22 34.5,8.57 33.65,8.57 33.65,10.22
  cutout Route2: 36,10.22 36,8.57 35.15,8.57 35.15,10.22
  cutout Route2: 37.5,10.22 37.5,8.57 36.65,8.57 36.65,10.22
  cutout Route2: 39,10.22 39,8.57 38.15,8.57 38.15,10.22
  cutout Route2: 40.5,10.22 40.5,8.57 39.65,8.57 39.65,10.22
  cutout Route2: 42,10.22 42,8.57 41.15,8.57 41.15,10.22
  cutout Route2: 43.5,10.22 43.5,8.57 42.65,8.57 42.65,10.22
N$7  (via drill 2.6 pad 3.81)
  other vias: 3.81,53.34
N$8  (via drill 2.6 pad 3.81)
  other vias: 53.34,53.34
N$9  (via drill 2.6 pad 3.81)
  other vias: 53.34,3.81
N$10  (via drill 2.6 pad 3.81)
  other vias: 3.81,3.81
N$11
  cutout Route2: 43,53.02 43,54.67 42.15,54.67 42.15,53.02
N$12
  Top 0.152: U1.7 54.52,42.33 54.86,42.67 54.86,43.43 54.61,43.69 R1.2 R2.1
N$13
  cutout Route2: 15,10.22 15,8.57 14.15,8.57 14.15,10.22
N_CHK_V  (via drill 0.25)
  Top 0.203: X-NORTH.7 12.32,49.29 v12.57,49.53 12.82,49.28 X-NORTH.9
  Bottom 0.203: X-WEST.114 7.5,44.83 7.37,44.96 7.37,45.09 7.24,45.09 7.11,45.09 7.11,44.96 7.75,44.33 X-WEST.112
  Bottom 0.457: 7.24,45.09 7.24,46.36 10.42,49.53 v12.57,49.53
N_I2C_V  (via drill 0.25)
  Top 0.203: X-NORTH.136 44.33,52.44 44.58,52.19 44.83,52.44 X-NORTH.138
  Top 0.457: 44.58,52.19 44.58,51.69 v51.44,44.83
  Bottom 0.203: X-EAST.9 52.19,44.33 51.94,44.58 | 51.94,44.58 52.19,44.83 X-EAST.7 | 51.94,44.58
  Bottom 0.457: 51.94,44.58 51.69,44.58 v51.44,44.83
N_SCK  (via drill 0.25)
  Top 0.203: X-NORTH.143 46.33,46.64 46.64,46.33 v47.27,46.33
  Bottom 0.203: v47.27,46.33 X-EAST.2
N_SCL  (via drill 0.25)
  Top 0.203: X-NORTH.144 v46.33,52.58
  Route2 0.203: v46.33,52.58 46.33,50.2 50.2,46.33 v52.45,46.33
  Bottom 0.203: v52.45,46.33 X-EAST.1
N_SDA  (via drill 0.25)
  Top 0.203: X-NORTH.142 v45.83,51.82
  Route2 0.203: v45.83,51.82 45.83,50.06 50.06,45.83 v51.69,45.83
  Bottom 0.203: v51.69,45.83 X-EAST.3
N_SDI  (via drill 0.25)
  Top 0.203: X-NORTH.139 45.33,46.11 46.11,45.33 v47.26,45.33
  Bottom 0.203: v47.26,45.33 X-EAST.6
N_SDO  (via drill 0.25)
  Top 0.203: X-NORTH.141 45.83,46.38 46.38,45.83 v46.5,45.83
  Bottom 0.203: v46.5,45.83 X-EAST.4
N_SPI_V  (via drill 0.25)
  Top 0.203: X-NORTH.135 44.33,49.29 v44.08,49.53 43.83,49.28 X-NORTH.133
  Bottom 0.203: X-EAST.8 49.65,44.83 49.78,44.96 49.78,45.09 49.91,45.09 50.04,45.09 50.04,44.96 49.41,44.33 X-EAST.10
  Bottom 0.457: 49.91,45.09 49.91,46.36 46.73,49.53 v44.08,49.53
N_VE  (via drill 0.25)
  Top 0.203: X-NORTH.104 v36.33,55.12 | v37.83,55.12 X-NORTH.110 | X-NORTH.116 v39.33,55.12 | v40.83,55.12 X-NORTH.122 | X-NORTH.128 v42.33,55.12 | v43.83,55.12 X-NORTH.134
  Bottom 0.203: X-EAST.49 v55.25,32.33 | X-EAST.51 v54.36,30.82 | X-EAST.53 v55.25,30.32 | X-EAST.55 v54.36,29.82 | X-EAST.57 v55.25,29.32 | X-EAST.59 v54.36,28.82
  pour Route2: 54.61,31.75 53.85,30.99 53.85,28.57 54.48,28.57 54.99,29.08 55.88,29.08 55.88,55.88 36.07,55.88 36.07,54.86 51.64,54.86 arc165 54.61,51.44
N_VE_CV  (via drill 0.25)
  Top 0.203: X-NORTH.5 11.82,46.11 11.04,45.33 v9.89,45.33
  Bottom 0.203: v9.89,45.33 X-WEST.116
N_VE_OV  (via drill 0.25)
  Top 0.203: X-NORTH.6 v11.82,52.58
  Route2 0.203: v11.82,52.58 11.82,49.92 7.22,45.33 v4.7,45.33
  Bottom 0.203: v4.7,45.33 X-WEST.115
N_VE_UV  (via drill 0.25)
  Top 0.203: X-NORTH.12 v13.32,51.82
  Route15 0.203: v13.32,51.82 13.32,51.42 7.11,45.21 7.11,43.18 5.76,41.83 v5.46,41.83
  Bottom 0.203: v5.46,41.83 X-WEST.105
N_VN  (via drill 0.25)
  Top 0.203: X-NORTH.50 v22.82,55.12 | v24.32,55.12 X-NORTH.56 | X-NORTH.62 v25.82,55.12 | v27.32,55.12 X-NORTH.68 | X-NORTH.74 v28.82,55.12 | v30.32,55.12 X-NORTH.80 | X-NORTH.86 v31.82,55.12 | v33.33,55.12 X-NORTH.92 | X-NORTH.98 v34.83,55.12
  Bottom 0.254: X-WEST.70 v7.24,30.82 | v8,26.32 X-WEST.52 | X-WEST.54 v7.24,26.82 | X-WEST.56 v8,27.32 | X-WEST.58 v7.24,27.82 | X-WEST.60 v8,28.32 | X-WEST.62 v7.24,28.82 | X-WEST.64 v8,29.32 | X-WEST.66 v7.24,29.82 | X-WEST.68 v8,30.32
  pour Route15: 8.25,30.99 4.45,30.99 2.92,32.51 2.92,50.62 arc140 6.22,54.86 35.05,54.86 35.05,55.88 1.27,55.88 1.27,26.16 8.25,26.16
N_VN_CV  (via drill 0.25)
  Top 0.203: X-NORTH.3 11.32,46.38 10.77,45.83 v10.65,45.83
  Bottom 0.203: v10.65,45.83 X-WEST.118
N_VN_OV  (via drill 0.25)
  Top 0.203: X-NORTH.4 v11.32,51.82
  Route2 0.203: v11.32,51.82 11.32,50.06 7.09,45.83 v5.46,45.83
  Bottom 0.203: v5.46,45.83 X-WEST.117
N_VN_UV  (via drill 0.25)
  Top 0.203: X-NORTH.10 v12.82,52.58
  Route15 0.203: v12.82,52.58 12.82,51.56 6.6,45.34 6.6,43.31 5.62,42.33 v4.7,42.33
  Bottom 0.203: v4.7,42.33 X-WEST.107
N_VW  (via drill 0.25)
  Top 0.203: X-NORTH.14 v13.82,55.12 | v15.32,55.12 X-NORTH.20 | X-NORTH.26 v16.82,55.12 | v18.32,55.12 X-NORTH.32 | X-NORTH.38 v19.82,55.12 | v21.32,55.12 X-NORTH.44
  Bottom 0.254: X-WEST.61 v1.9,28.82 | X-WEST.63 v2.79,29.32 | 1.9,29.84 v1.9,29.82 X-WEST.65 | X-WEST.67 v2.79,30.32 | X-WEST.69 v1.9,30.82 | X-WEST.71 v1.9,32.33
  pour Route2: 2.03,28.57 1.27,28.57 1.27,55.88 21.59,55.88 21.59,54.86 5.51,54.86 arc-165 2.54,51.44 2.54,31.37 3.3,30.61 3.3,29.08 2.54,29.08
N_VW_CV  (via drill 0.25)
  Top 0.203: X-NORTH.1 10.82,46.64 10.51,46.33 v9.88,46.33
  Bottom 0.203: v9.88,46.33 X-WEST.120
N_VW_OV  (via drill 0.25)
  Top 0.203: X-NORTH.2 v10.82,52.58
  Route2 0.203: v10.82,52.58 10.82,50.2 6.95,46.33 v4.7,46.33
  Bottom 0.203: v4.7,46.33 X-WEST.119
N_VW_UV  (via drill 0.25)
  Top 0.203: X-NORTH.8 v12.32,51.82
  Route15 0.203: v12.32,51.82 12.32,51.7 6.1,45.47 6.1,43.43 5.49,42.83 v5.46,42.83
  Bottom 0.203: v5.46,42.83 X-WEST.109
S_CHK_V  (via drill 0.25)
  Top 0.203: X-SOUTH.7 44.83,7.86 v44.58,7.62 44.33,7.87 X-SOUTH.9
  Bottom 0.203: X-EAST.114 49.65,12.32 49.78,12.19 49.78,12.06 49.91,12.06 50.04,12.06 50.04,12.19 49.41,12.82 X-EAST.112
  Bottom 0.457: 49.91,12.06 49.91,10.79 46.73,7.62 v44.58,7.62
S_I2C_V  (via drill 0.25)
  Top 0.203: X-SOUTH.136 12.82,4.71 12.57,4.96 12.32,4.71 X-SOUTH.138 | v5.21,12.57
  Top 0.457: 12.57,4.96 12.57,5.46 5.46,12.57 v5.21,12.57
  Bottom 0.203: X-WEST.9 4.96,12.82 v5.21,12.57 4.96,12.32 X-WEST.7
S_SCK  (via drill 0.25)
  Top 0.203: X-SOUTH.143 10.82,10.51 10.51,10.82 v9.88,10.82
  Bottom 0.203: v9.88,10.82 X-WEST.2
S_SCL  (via drill 0.25)
  Top 0.203: X-SOUTH.144 v10.82,4.57
  Route2 0.203: v10.82,4.57 10.82,6.95 6.95,10.82 v4.7,10.82
  Bottom 0.203: v4.7,10.82 X-WEST.1
S_SDA  (via drill 0.25)
  Top 0.203: X-SOUTH.142 v11.32,5.33
  Route2 0.203: v11.32,5.33 11.32,7.09 7.09,11.32 v5.46,11.32
  Bottom 0.203: v5.46,11.32 X-WEST.3
S_SDI  (via drill 0.25)
  Top 0.203: X-SOUTH.139 11.82,11.04 11.04,11.82 v9.89,11.82
  Bottom 0.203: v9.89,11.82 X-WEST.6
S_SDO  (via drill 0.25)
  Top 0.203: X-SOUTH.141 11.32,10.77 10.77,11.32 v10.65,11.32
  Bottom 0.203: v10.65,11.32 X-WEST.4
S_SPI_V  (via drill 0.25)
  Top 0.203: X-SOUTH.135 12.82,7.86 v13.07,7.62 13.32,7.87 X-SOUTH.133
  Bottom 0.203: X-WEST.8 7.5,12.32 7.37,12.19 7.37,12.06 7.24,12.06 7.11,12.06 7.11,12.19 7.75,12.82 X-WEST.10
  Bottom 0.457: 7.24,12.06 7.24,10.79 10.42,7.62 v13.07,7.62
S_VE  (via drill 0.25)
  Top 0.203: X-SOUTH.14 v43.33,2.03 | v41.83,2.03 X-SOUTH.20 | X-SOUTH.26 v40.33,2.03 | v38.83,2.03 X-SOUTH.32 | X-SOUTH.38 v37.33,2.03 | v35.83,2.03 X-SOUTH.44
  Bottom 0.203: X-EAST.61 v55.25,28.32 | X-EAST.63 v54.36,27.82 | X-EAST.65 v55.25,27.32 | X-EAST.67 v54.36,26.82 | X-EAST.69 v55.25,26.32 | v55.25,24.82 X-EAST.71
  pour Route2: 55.12,28.57 55.88,28.57 55.88,1.27 35.56,1.27 35.56,2.29 51.64,2.29 arc-165 54.61,5.71 54.61,25.78 53.85,26.54 53.85,28.07 54.61,28.07
S_VE_CV  (via drill 0.25)
  Top 0.203: X-SOUTH.1 46.33,10.51 46.64,10.82 v47.27,10.82
  Bottom 0.203: v47.27,10.82 X-EAST.120
S_VE_OV  (via drill 0.25)
  Top 0.203: X-SOUTH.2 v46.33,4.57
  Route2 0.203: v46.33,4.57 46.33,6.95 50.2,10.82 v52.45,10.82
  Bottom 0.203: v52.45,10.82 X-EAST.119
S_VE_UV  (via drill 0.25)
  Top 0.203: X-SOUTH.8 v44.83,5.33
  Route15 0.203: v44.83,5.33 44.83,5.45 51.05,11.68 51.05,13.72 51.66,14.32 v51.69,14.32
  Bottom 0.203: v51.69,14.32 X-EAST.109
S_VS  (via drill 0.25)
  Top 0.203: X-SOUTH.50 v34.33,2.03 | v22.32,2.03 X-SOUTH.98 | X-SOUTH.92 v23.82,2.03 | v25.32,2.03 X-SOUTH.86 | X-SOUTH.80 v26.82,2.03 | v28.32,2.03 X-SOUTH.74 | X-SOUTH.68 v29.82,2.03 | v31.32,2.03 X-SOUTH.62 | X-SOUTH.56 v32.83,2.03
  Route15 0.203: v32.83,2.03 33.02,2.03
  Bottom 0.254: X-EAST.52 v49.15,30.82 | X-EAST.54 v49.91,30.32 | X-EAST.56 v49.15,29.82 | X-EAST.58 v49.91,29.32 | X-EAST.60 v49.15,28.82 | X-EAST.62 v49.91,28.32 | X-EAST.64 v49.15,27.82 | X-EAST.66 v49.91,27.32 | X-EAST.68 v49.15,26.82 | X-EAST.70 v49.91,26.32
  pour Route15: 48.89,26.16 52.7,26.16 54.23,24.64 54.23,6.53 arc140 50.93,2.29 22.1,2.29 22.1,1.27 55.88,1.27 55.88,30.99 48.89,30.99
S_VS_CV  (via drill 0.25)
  Top 0.203: X-SOUTH.3 45.83,10.77 46.38,11.32 v46.5,11.32
  Bottom 0.203: v46.5,11.32 X-EAST.118
S_VS_OV  (via drill 0.25)
  Top 0.203: X-SOUTH.4 v45.83,5.33
  Route2 0.203: v45.83,5.33 45.83,7.09 50.06,11.32 v51.69,11.32
  Bottom 0.203: v51.69,11.32 X-EAST.117
S_VS_UV  (via drill 0.25)
  Top 0.203: X-SOUTH.10 v44.33,4.57
  Route15 0.203: v44.33,4.57 44.33,5.59 50.55,11.81 50.55,13.84 51.53,14.82 v52.45,14.82
  Bottom 0.203: v52.45,14.82 X-EAST.107
S_VW  (via drill 0.25)
  Top 0.203: X-SOUTH.104 v20.82,2.03 | v19.32,2.03 X-SOUTH.110 | X-SOUTH.116 v17.82,2.03 | v16.32,2.03 X-SOUTH.122 | X-SOUTH.134 v13.32,2.03 | v14.82,2.03 X-SOUTH.128
  Bottom 0.254: X-WEST.49 v1.9,24.82 | X-WEST.51 v2.79,26.32 | X-WEST.53 v1.9,26.82 | X-WEST.55 v2.79,27.32 | X-WEST.57 v1.9,27.82 | X-WEST.59 v2.79,28.32
  pour Route2: 2.54,25.4 3.3,26.16 3.3,28.57 2.67,28.57 2.16,28.07 1.27,28.07 1.27,1.27 21.08,1.27 21.08,2.29 5.51,2.29 arc165 2.54,5.71
S_VW_CV  (via drill 0.25)
  Top 0.203: X-SOUTH.5 45.33,11.04 46.11,11.82 v47.26,11.82
  Bottom 0.203: v47.26,11.82 X-EAST.116
S_VW_OV  (via drill 0.25)
  Top 0.203: X-SOUTH.6 v45.33,4.57
  Route2 0.203: v45.33,4.57 45.33,7.22 49.92,11.82 v52.45,11.82
  Bottom 0.203: v52.45,11.82 X-EAST.115
S_VW_UV  (via drill 0.25)
  Top 0.203: X-SOUTH.12 v43.83,5.33
  Route15 0.203: v43.83,5.33 43.83,5.72 50.04,11.94 50.04,13.97 51.39,15.32 v51.69,15.32
  Bottom 0.203: v51.69,15.32 X-EAST.105
W_I2C_V  (1 unrouted)
W_SDI_V  (1 unrouted)
W_VW  (5 unrouted)

## Text on the board
_tsilk: AXIOM Beta CMV12000 Interface Board | V0.3 / R1.0 | Copyright (C) 2014 Herbert Poetzl / Licensed under CERN OHL v1.2